# EAGLE board Temp Sensor A (EAGLE 8.4.0)
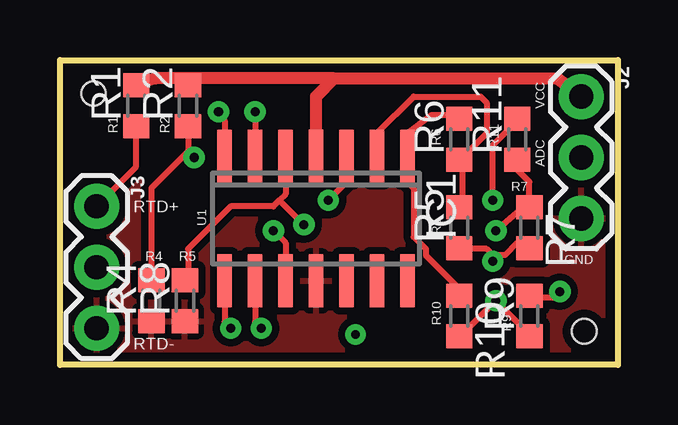
[diagram p0: board, top side]
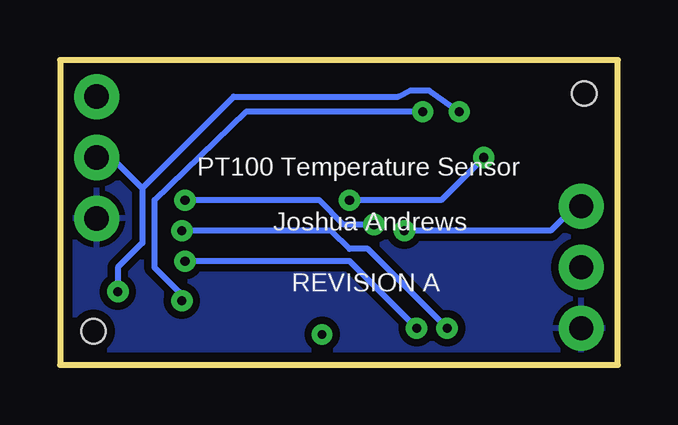
[diagram p1: board, bottom side, seen from below]

Size 23.24 x 12.7 mm. Coordinates in mm from the lower left corner, seen from the top.
Outline: 0,0 0,12.7 23.24,12.7 23.24,0 0,0
Copper layers (1*16): Top 0.0356mm / dielectric 1.5011mm / Bottom 0.0356mm
Design rules "oshpark-2layer": minimum track width 10mil, minimum drill 15mil, track to track 10mil, track to pad 10mil, pad to pad 10mil, via to via 10mil, smd to smd 10mil, copper to edge 15mil, drill to drill 10mil, minimum pad ring 10mil, minimum via ring 10mil, stop-mask expansion 8mil, vias tented up to drill 8mil, thermal gap 10mil
Holes 1.02 mm at 1.4,11.3 21.84,1.4

## Footprints (pad centres in the part's own frame; a part is rotated, then mirrored left to right if it is on the bottom)
SO14 = smd 0.6 x 2.2: 1 -3.81,-2.6; 2 -2.54,-2.6; 3 -1.27,-2.6; 4 0,-2.6; 5 1.27,-2.6; 6 2.54,-2.6; 7 3.81,-2.6; 8 3.81,2.6; 9 2.54,2.6; 10 1.27,2.6; 11 0,2.6; 12 -1.27,2.6; 13 -2.54,2.6; 14 -3.81,2.6
1X03 = drill 1.016 pad 1.88: 1 0,0; 2 2.54,0; 3 5.08,0
R0603 = smd 1 x 1.1: 1 -0.85,0; 2 0.85,0

## Placement (x,y rotation side)
IC1  MCP604SL  [SO14]  10.67,6.1 180 top
J2  455-1750-1-ND  [1X03]  21.72,11.18 270 top
J3  455-1750-1-ND  [1X03]  1.52,6.6 270 top
R1  10K  [R0603]  3.17,10.79 90 top
R2  [R0603]  5.33,10.79 90 top
R4  [R0603]  3.81,2.67 90 top
R5  [R0603]  16.64,5.71 90 top
R6  [R0603]  16.64,9.4 90 top
R7  [R0603]  19.56,5.71 270 top
R8  [R0603]  5.21,2.67 90 top
R9  [R0603]  19.56,2.03 90 top
R10  [R0603]  16.64,2.03 270 top
R11  [R0603]  19.05,9.4 90 top

## Library data of the parts
IC1 = linear
J2 J3 = SparkFun-Connectors; PROD_ID: XXX-00000
R1 R2 R4-R11 = resistor

## Nets
ADC: IC1.7 J2.2 R9.2
GND: IC1.11 J2.3 J3.3 R4.1 R8.1
N$1: IC1.10 J3.1 R1.1
N$2: IC1.3 R2.1 R4.2
N$3: IC1.8 R7.1 R11.1
N$5: IC1.1 R6.2 R10.1
N$7: IC1.2 R5.2 R6.1
N$8: IC1.9 R5.1 R7.2
N$11: IC1.5 R8.2 R11.2
N$12: IC1.6 R9.1 R10.2
VCC: IC1.4 J2.1 R1.2 R2.2

## Tracks (layer width: path | path; a pad name or v marks a point on that pad's centre or on a via)
ADC  (via drill 0.38)
  Top 0.254: v20.83,3.05 20.57,2.79 19.56,2.79 R9.2 | v6.6,10.54 6.86,10.16 IC1.7
  Bottom 0.254: v20.83,3.05 20.83,4.06 19.81,5.08 19.81,7.37 | 19.81,7.37 21.08,8.64 J2.2 | v6.6,10.54 7.87,11.43 8.64,11.43 9.14,11.18 16,11.18 19.81,7.37
GND
  pour Bottom (isolate 0.305): 0,12.7 0,0 23.24,0 23.24,12.7
  pour Top (isolate 0.305): 0,12.7 0,0 23.24,0 23.24,12.7
N$1  (via drill 0.38)
  Top 0.254: IC1.10 9.4,5.08 v8.89,5.59 | J3.1 3.17,8.26 R1.1
  Bottom 0.254: v8.89,5.59 2.79,5.59 1.78,6.6 J3.1
N$2  (via drill 0.38)
  Top 0.254: R4.2 3.81,7.37 5.33,8.89 | R2.1 5.33,8.89 | IC1.3 11.94,7.62 v11.18,6.86 | 5.33,8.89 v5.59,8.64
  Bottom 0.254: v11.18,6.86 7.37,6.86 v5.59,8.64
N$3  (via drill 0.38)
  Top 0.254: v18.16,5.59 19.05,6.35 19.56,6.35 R7.1 19.56,7.62 19.05,8.13 R11.1 | v7.11,1.52 6.86,1.78 IC1.8
  Bottom 0.254: v18.16,5.59 11.94,5.59 11.18,4.83 10.41,4.83 v7.11,1.52
N$4  (via drill 0.35)
  other vias: 12.32,1.27
N$5
  Top 0.254: R10.1 16.51,3.05 16.51,3.3 15.24,4.57 15.24,4.83 14.73,5.33 14.73,7.37 14.48,7.62 IC1.1 14.48,9.65 15.49,10.41 16.51,10.41 R6.2
N$7
  Top 0.254: 16.76,8.64 17.02,8.38 16.76,8.13 16.76,6.6 R5.2 | 16.76,8.64 17.78,9.65 17.78,10.92 17.53,11.18 14.73,11.18 13.21,9.65 IC1.2 | 16.76,8.64 R6.1
N$8  (via drill 0.38)
  Top 0.254: 18.29,4.57 18.54,4.57 19.05,5.08 19.56,5.08 R7.2 | 18.29,4.57 18.03,4.57 17.78,4.83 16.76,4.83 R5.1 | v18.03,4.32 18.29,4.57 | v8.38,1.52 8.13,1.78 IC1.9
  Bottom 0.254: v18.03,4.32 11.18,4.32 v8.38,1.52
N$11  (via drill 0.38)
  Top 0.254: 9.14,6.86 9.4,7.11 IC1.5 | 9.14,6.86 8.89,6.6 7.11,6.6 5.33,4.83 5.33,3.56 R8.2 | 9.14,6.86 v10.16,5.84 | R11.2 19.01,10.25 19.01,10.12 18.03,9.14 v18.03,6.86
  Bottom 0.254: v18.03,6.86 12.45,6.86 11.43,5.84 v10.16,5.84
N$12  (via drill 0.38)
  Top 0.254: R10.2 16.76,1.27 v18.16,2.67 19.56,1.27 R9.1 | v8.13,10.54 IC1.6
  Bottom 0.254: v18.16,2.67 18.29,3.05 19.3,4.06 19.3,6.86 15.49,10.54 v8.13,10.54
VCC
  Top 0.508: 5.29,11.64 R2.2 5.33,11.81 5.46,11.94 | J2.1 20.7,11.94 11.43,11.94 | R1.2 3.98,11.94 5.46,11.94 | 11.43,11.94 5.46,11.94 | IC1.4 10.67,11.18 11.43,11.94

## Text on the board
tPlace: VCC | R1 | R2 | R6 | R11 | ADC | R7 | RTD+ | U1 | R5 | GND | R4 | R5 | R10 | RTD- | R9
bPlace: PT100 Temperature Sensor | Joshua Andrews | REVISION A